# Altium PCB STB_DUTcarrier.PcbDoc
Units mm, origin at the board's own origin, x right, y up, seen from the top; angles counter-clockwise.
Board outline 154 x 150 mm, 2 copper layers (Top Layer, Bottom Layer), stack 0.781 mm thick; 9 components, 12 nets, 177 pads, 161 vias.
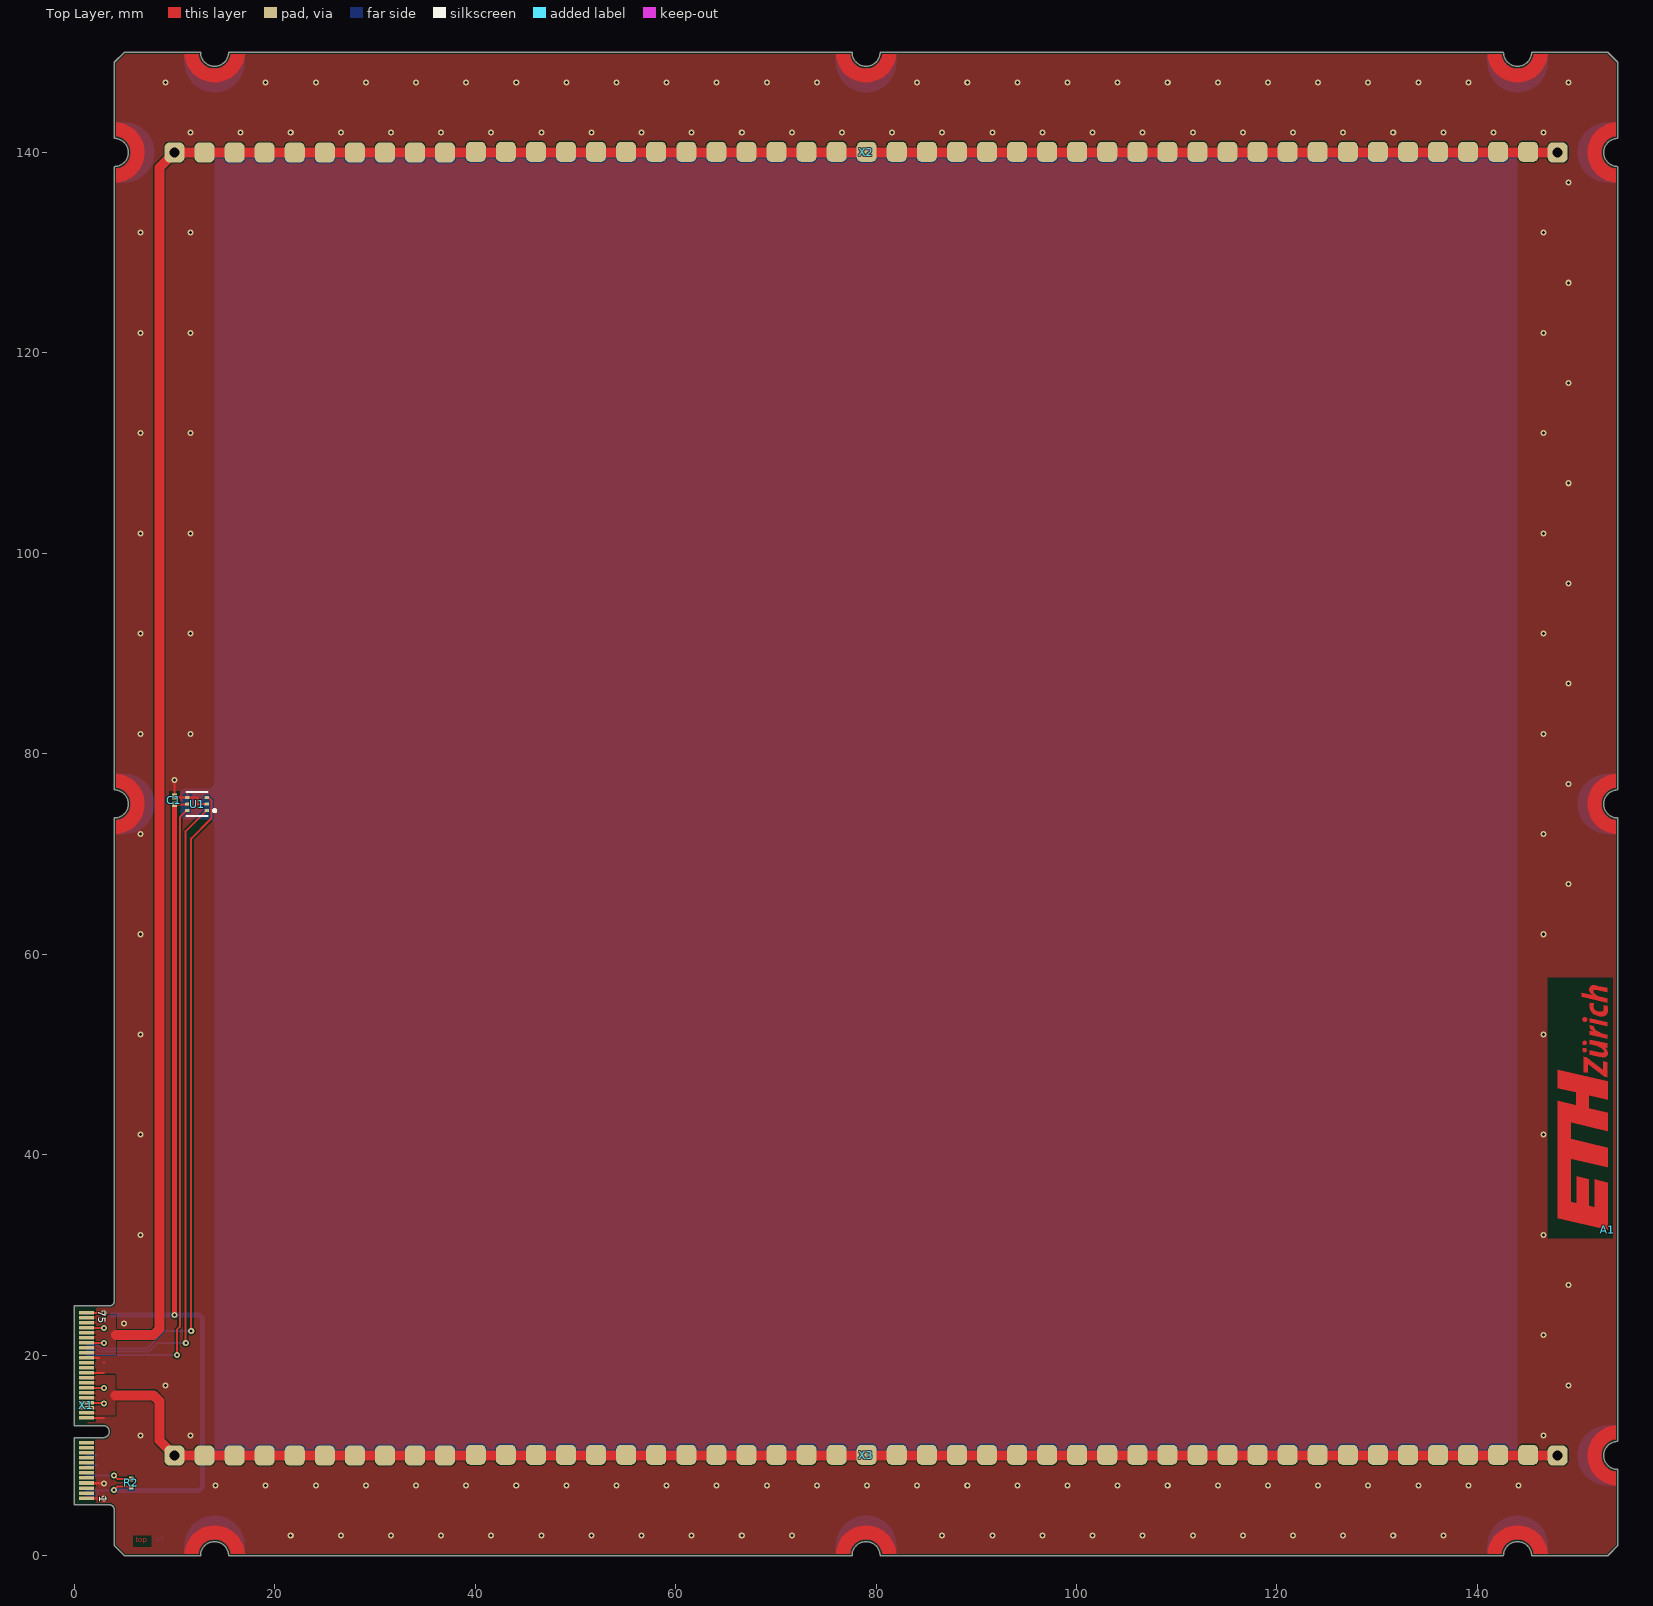
[diagram p0: Top Layer view]
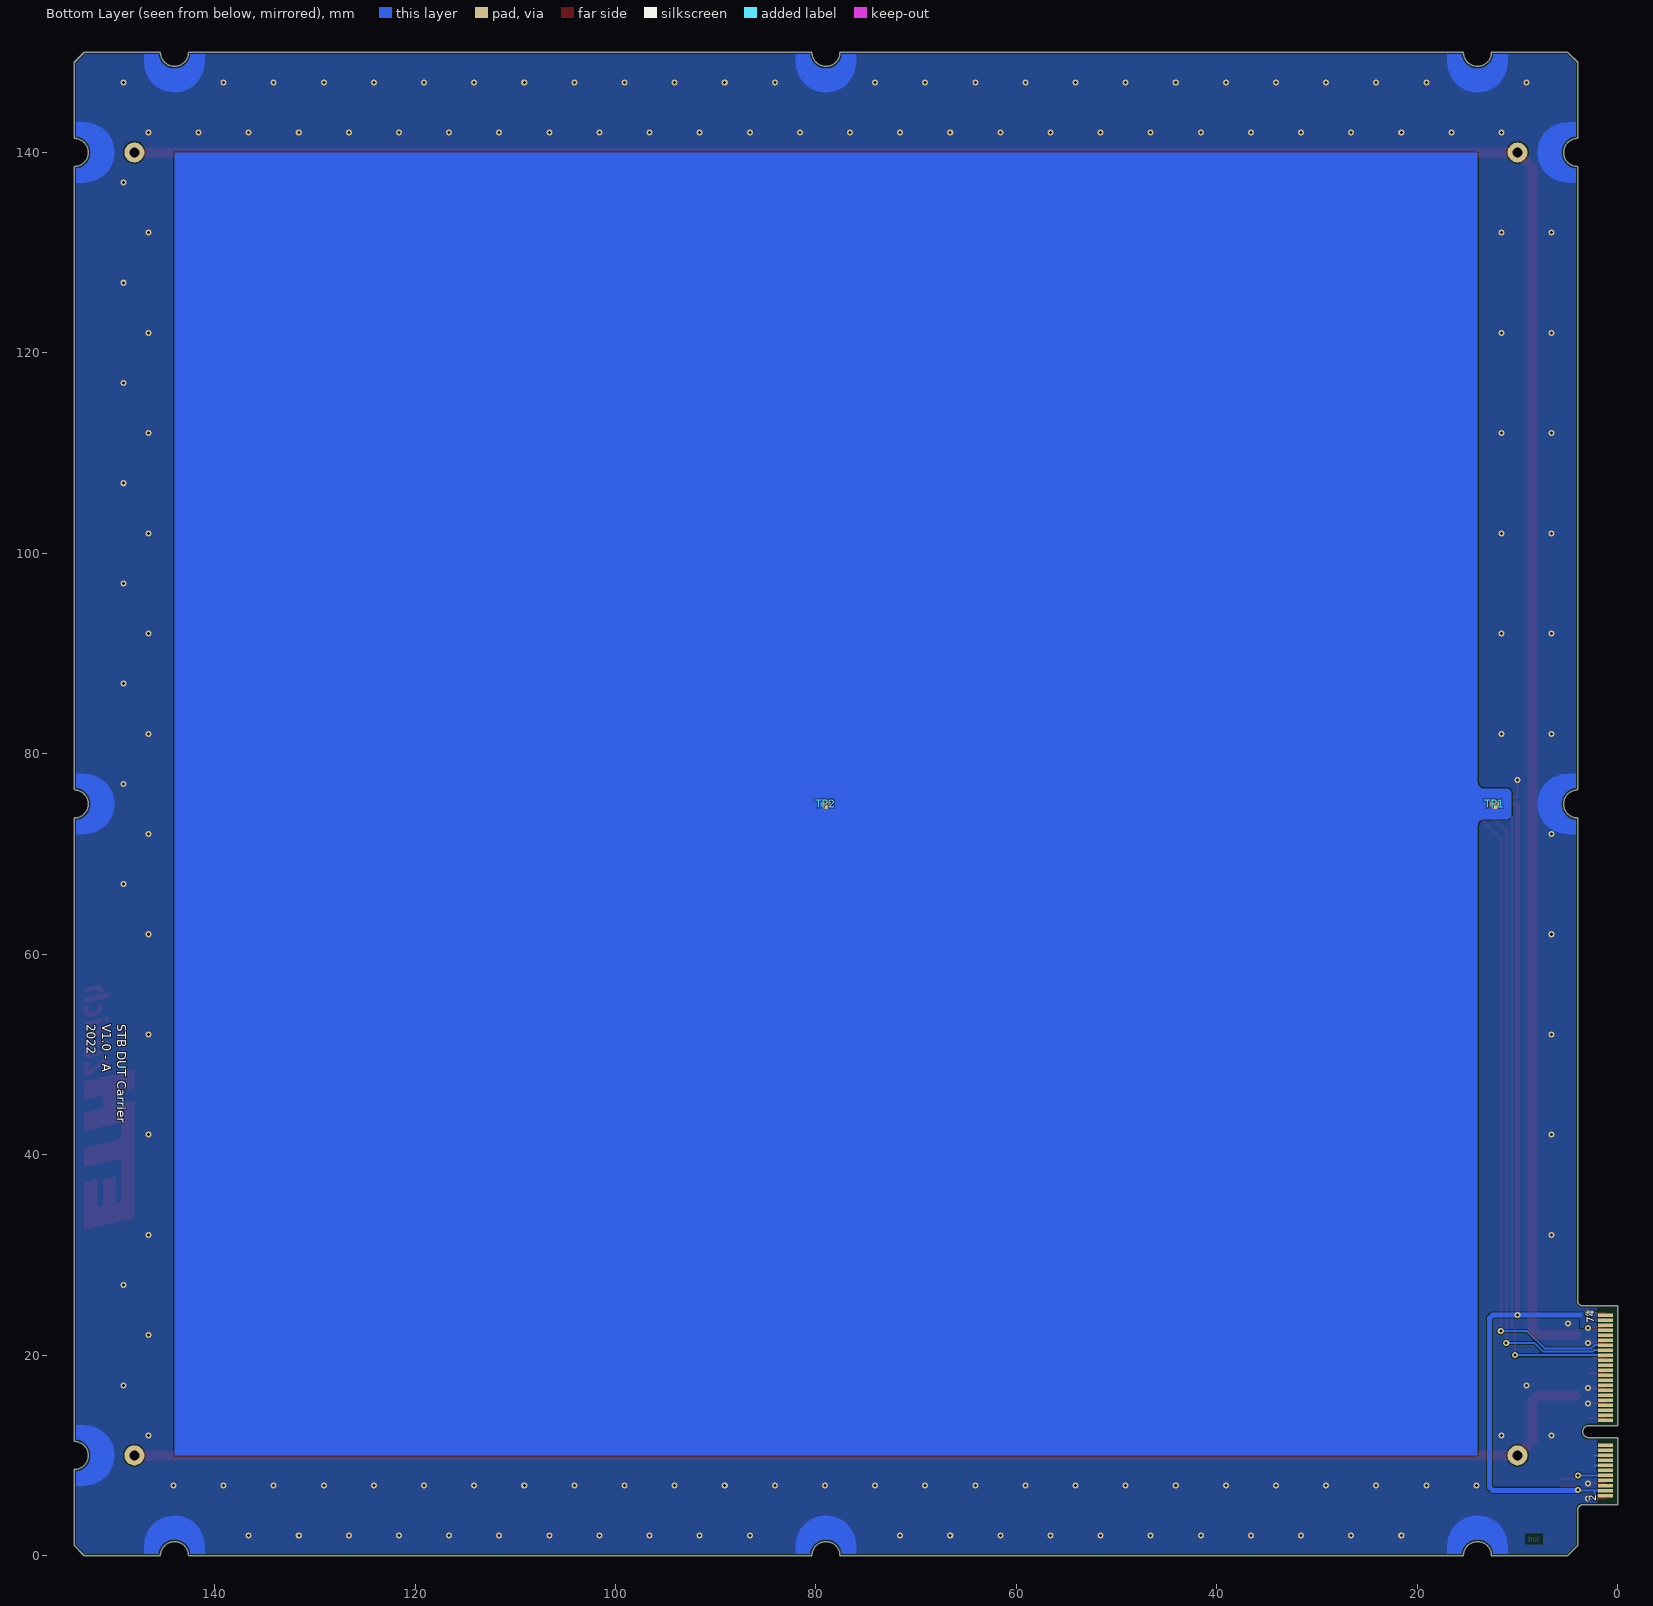
[diagram p1: Bottom Layer view, seen from below]

## Layer stack, top to bottom
Top Solder: solder mask 0.01, SM-001, Dk 4
Top Layer: signal copper 0.035
Dielectric 1: core 0.7112, Core-039, Dk 4.8
Bottom Layer: signal copper 0.035
Bottom Solder: solder mask 0.01, SM-001, Dk 4

## Board outline
0,5.075 3.5,5.075 cw(c3.5,4.575) 4,4.575 4,1 5,0 12.6,0 cw(c14,0) 14,1.4 cw(c14,0) 15.4,0 77.6,0 cw(c79,0) 79,1.4 cw(c79,0) 80.4,0 142.6,0 cw(c144,0) 144,1.4 cw(c144,0) 145.4,0 153,0 154,1 154,8.6 cw(c154,10) 152.6,10 cw(c154,10) 154,11.4 154,73.6 cw(c154,75) 152.6,75 cw(c154,75) 154,76.4 154,138.6 cw(c154,140) 152.6,140 cw(c154,140) 154,141.4 154,149 153,150 147,150 145.4,150 cw(c144,150) 144,148.6 cw(c144,150) 142.6,150 80.4,150 cw(c79,150) 79,148.6 cw(c79,150) 77.6,150 76,150 17,150 15.4,150 cw(c14,150) 14,148.6 cw(c14,150) 12.6,150 5,150 4,149 4,143 4,141.4 cw(c4,140) 5.4,140 cw(c4,140) 4,138.6 4,76.4 cw(c4,75) 5.4,75 cw(c4,75) 4,73.6 4,72 4,25.425 cw(c3.5,25.425) 3.5,24.925 0,24.925 0,12.975 2.9,12.975 cw(c2.9,12.375) 3.5,12.375 cw(c2.9,12.375) 2.9,11.775 0,11.775

## Design rules (kind name [scope] priority, off if disabled: settings)
BoardOutlineClearance [All] p1: gap=0.21 ignorepadtopadclearanceinfootprint=FALSE
Clearance [All] p1: gap=0.125 ignorepadtopadclearanceinfootprint=FALSE
PlaneConnect [All] p1: pad.planeconnectstyle=Relief pad.reliefexpansion=0.508 pad.reliefentries=4 pad.reliefconductorwidth=0.254 pad.reliefairgap=0.254 via.planeconnectstyle=Direct via.reliefexpansion=0.508 via.reliefentries=4 via.reliefconductorwidth=0.254 via.reliefairgap=0.254
PolygonConnect [All] p1: thpad.connectstyle=Relief thpad.reliefconductorwidth=0.254 thpad.reliefentries=4 thpad.polygonreliefangle="90 Angle" thpad.airgapwidth=0.254 smdpad.connectstyle=Relief smdpad.reliefconductorwidth=0.254 smdpad.reliefentries=4 smdpad.polygonreliefangle="90 Angle" smdpad.airgapwidth=0.254 via.connectstyle=Direct via.reliefconductorwidth=0.254 via.reliefentries=4 via.polygonreliefangle="90 Angle" via.airgapwidth=0.254
RoutingVias [All] p1: holewidth=0.3 width=0.604 viastyle="Through Hole" minholewidth=0.3 minwidth=0.604 maxholewidth=3 maxwidth=6
SolderMaskExpansion [All] p1: expansion=0.102 istentingtop=FALSE
Width [All] p1: maxlimit=4 minlimit=0.125 preferedwidth=0.2
29 further rules are at their usual default settings.

## Components (designator, comment, footprint, x,y, rotation, side; value= is the part's Value field where it differs from the comment)
A1 "Logo ETH Zurich" eth-zurich_5mm 153,32.5 r90 top
C1 "100nF" CAPC1050X55X23LL05T13 9.998,75.349 r270 top
R2 "100k" RESC1005X40X25LL05T10 5.7,7.25 r270 top value="100 kOhm"
TP1 "testPoint_1mm" TP-SM-C-100 12.264,75 r180 bottom
TP2 "testPoint_1mm" TP-SM-C-100 79,75 r90 bottom
U1 "TMP116NAIDRVR" FP-DRV0006B-MFG 12.264,74.978 r180 top
X1 "CONN PWR CARD EDGE PCB SLOT MALE" CON-67_0.5MM_PCB_SLOT 1.2,15 r270 top
X2 "CellConnector" cellConnector 79,140 r180 top
X3 "CellConnector" cellConnector 79,10 r180 top

## Footprints (in the part's own frame and the unit in brackets; to place one, negate y for a bottom-side part, rotate by r counter-clockwise, add the part's x,y. Pads: shape width x height; smd on the part's side, far side on the other; paste and mask are expansions set on the pad)
CAPC1050X55X23LL05T13 [mm] "Chip Capacitor, 2-Leads, Body 1.05x0.55mm, IPC High Density"
  rect 0.56x0.52 smd: 1(-0.39,0) 2(0.39,0)
  body extent -0.53,-0.28 0.53,0.28, height 0.55
cellConnector [mm] "dumm for cell ceonnection"
  rrect50% 2x2 smd paste-100: 1(-69,0) 1(-66.065,-0.063) 1(-63.065,-0.063) 1(-60.065,-0.063) 1(-57.065,-0.063) 1(-54.065,-0.063) 1(-51.065,-0.063) 1(-48.065,-0.063) 1(-45.065,-0.063) 1(-42.065,-0.063) 1(-39.065,-0.063) 1(-36.065,-0.063) 1(-33.065,-0.063) 1(-30.065,-0.063) 1(-27.065,-0.063) 1(-24.065,-0.063) 1(-21.065,-0.063) 1(-18.065,-0.063) 1(-15.065,-0.063) 1(-12.065,-0.063) 1(-9.065,-0.063) 1(-6.065,-0.063) 1(-3.065,-0.063) 1(-0.065,-0.063) 1(2.935,-0.063) 1(5.935,-0.063) 1(8.935,-0.063) 1(11.935,-0.063) 1(14.935,-0.063) 1(17.935,-0.063) 1(20.935,-0.063) 1(23.935,-0.063) 1(26.935,-0.063) 1(29.935,-0.063) 1(32.935,-0.063) 1(35.935,-0.063) 1(38.935,-0.063) 1(42,0) 1(45,0) 1(48,0) 1(51,0) 1(54,0) 1(57,0) 1(60,0) 1(63,0) 1(66,0) 1(69,0)
  Top Layer lines w1: 69,0 66,0 63,0 60,0 57,0 54,0 51,0 48,0 45,0 42,0 38.935,0 35.935,0 32.935,0 29.935,0 26.935,0 23.935,0 20.935,0 17.935,0 14.935,0 11.935,0 8.935,0 5.935,0 2.935,0 -0.065,0 -3.065,0 -6.065,0 -9.065,0 -12.065,0 -15.065,0 -18.065,0 -21.065,0 -24.065,0 -27.065,0 -30.065,0 -33.065,0 -36.065,0 -39.065,0 -42.065,0 -45.065,0 -48.065,0 -51.065,0 -54.065,0 -57.065,0 -60.065,0 -63.065,0 -66.065,0 -69,0
CON-67_0.5MM_PCB_SLOT [mm] "Connector 67, 0.5mm pitch - No BOM"
  rect 0.35x1.5 smd: 1(9.25,0) 3(8.75,0) 5(8.25,0) 7(7.75,0) 9(7.25,0) 11(6.75,0) 13(6.25,0) 15(5.75,0) 17(5.25,0) 19(4.75,0) 21(4.25,0) 23(3.75,0) 33(1.25,0) 35(0.75,0) 37(0.25,0) 39(-0.25,0) 41(-0.75,0) 43(-1.25,0) 45(-1.75,0) 47(-2.25,0) 49(-2.75,0) 51(-3.25,0) 53(-3.75,0) 55(-4.25,0) 57(-4.75,0) 59(-5.25,0) 61(-5.75,0) 63(-6.25,0) 65(-6.75,0) 67(-7.25,0) 69(-7.75,0) 71(-8.25,0) 73(-8.75,0) 75(-9.25,0)
  rect 0.35x1.5 smd far side: 2(9,0) 4(8.5,0) 6(8,0) 8(7.5,0) 10(7,0) 12(6.5,0) 14(6,0) 16(5.5,0) 18(5,0) 20(4.5,0) 22(4,0) 32(1.5,0) 34(1,0) 36(0.5,0) 38(0,0) 40(-0.5,0) 42(-1,0) 44(-1.5,0) 46(-2,0) 48(-2.5,0) 50(-3,0) 52(-3.5,0) 54(-4,0) 56(-4.5,0) 58(-5,0) 60(-5.5,0) 62(-6,0) 64(-6.5,0) 66(-7,0) 68(-7.5,0) 70(-8,0) 72(-8.5,0) 74(-9,0)
eth-zurich_5mm [mm] "Logo ETH Zurich"
  Top Layer circle w0.45: c17.94,2.315 r0.001
  Top Layer circle w0.45: c18.655,2.315 r0.001
  Top Layer circle w0.5: c20.997,2.288 r0.001
  Top Layer region: 19.763,1.3 19.763,1.3 19.87,1.785 19.46,1.785 19.072,0.04 19.483,0.04 19.545,0.323 19.64,0.63 19.75,0.9 19.84,1.07 19.965,1.235 20.05,1.32 20.12,1.37 20.19,1.4 20.24,1.4 20.308,1.382 20.4,1.8 20.34,1.81 20.28,1.81 20.22,1.8 20.13,1.76 20.07,1.72 19.99,1.65 19.92,1.58 19.84,1.46
  Top Layer region: 17.265,2.4 17.265,2.4 15.753,2.4 15.66,1.985 16.575,1.985 15.288,0.308 15.23,0.04 16.74,0.04 16.833,0.455 15.915,0.455 17.207,2.14
  Top Layer region: 18.61,0.04 18.61,0.04 18.998,1.785 18.535,1.785 18.385,1.102 18.3,0.9 18.2,0.72 18.1,0.56 18,0.455 17.92,0.4 17.84,0.36 17.78,0.36 17.72,0.38 17.68,0.42 17.67,0.48 17.67,0.56 17.68,0.63 17.938,1.785 17.492,1.785 17.3,0.9 17.227,0.57 17.22,0.42 17.24,0.28 17.28,0.16 17.36,0.08 17.46,0.02 17.54,0 17.7,0 17.86,0.04 18,0.12 18.105,0.225 18.22,0.36 18.15,0.04
  Top Layer region: 14.825,0 14.825,0 16,5 14.155,5 13.712,3.117 12.432,3.117 12.872,5 1.175,5 0,0 1.953,0 4.73,0 5.035,1.3 2.26,1.3 2.402,1.91 5.058,1.91 5.34,3.11 2.682,3.11 2.822,3.7 7.123,3.7 6.25,0 8.205,0 9.075,3.7 10.723,3.7 9.855,0 11.7,0 12.15,1.917 13.43,1.917 12.98,0
  Top Layer region: 22.69,1.753 22.69,1.753 22.6,1.785 22.5,1.8 22.34,1.8 22.16,1.785 21.97,1.74 21.81,1.66 21.68,1.56 21.6,1.48 21.52,1.38 21.45,1.26 21.4,1.14 21.35,1 21.32,0.87 21.3,0.74 21.3,0.57 21.32,0.42 21.35,0.32 21.4,0.22 21.46,0.14 21.54,0.08 21.63,0.04 21.72,0.02 21.92,0 22.02,0 22.2,0.02 22.313,0.048 22.36,0.06 22.403,0.453 22.31,0.42 22.18,0.39 22.08,0.38 22.01,0.38 21.93,0.4 21.86,0.44 21.82,0.48 21.79,0.54 21.77,0.61 21.76,0.68 21.76,0.77 21.78,0.9 21.82,1.03 21.87,1.14 21.93,1.23 22.02,1.34 22.1,1.39 22.18,1.42 22.26,1.43 22.38,1.43 22.49,1.42 22.54,1.41 22.61,1.39
  Top Layer region: 23.53,1.6 23.53,1.6 23.415,1.465 23.667,2.602 23.257,2.602 22.69,0.04 23.1,0.04 23.25,0.723 23.335,0.925 23.435,1.105 23.535,1.265 23.635,1.37 23.715,1.425 23.795,1.465 23.855,1.465 23.915,1.445 23.955,1.405 23.965,1.345 23.965,1.265 23.955,1.195 23.697,0.04 24.142,0.04 24.335,0.925 24.408,1.255 24.415,1.405 24.395,1.545 24.355,1.665 24.275,1.745 24.175,1.805 24.095,1.825 23.935,1.825 23.775,1.785 23.635,1.705
  Top Layer region: 20.73,0.04 20.73,0.04 21.117,1.785 20.707,1.785 20.32,0.04
FP-DRV0006B-MFG [mm]
  rrect33% 0.45x0.3 smd paste+0 mask+0: 1(-0.975,0.65) 2(-0.975,0) 3(-0.975,-0.65) 4(0.975,-0.65) 5(0.975,0) 6(0.975,0.65)
  silkscreen extent -1.88,-1.22 1.05,1.2, body extent -1.3,-1.15 1.3,1.15, height 0.25
RESC1005X40X25LL05T10 [mm] "Chip Resistor, 2-Leads, Body 1.00x0.50mm, IPC High Density"
  rect 0.5x0.45 smd: 1(-0.375,0) 2(0.375,0)
  body extent -0.53,-0.27 0.53,0.28, height 0.4
TP-SM-C-100 [mm] "Test Point, Surface Mounting, Circular, Pad Diameter 1mm"
  round 1 smd paste-1: 1(0,0)

## Part data
A1: library part CMP-00038-1
C1: library part CMP-2000-05439-1, "Chip Capacitor, 100 nF, +/- 10%, 16 V, -55 to 125 degC, 0402 (1005 Metric), RoHS, Tape and Reel", Capacitor Type=Ceramic, Case Size/Dimension=0402, Dielectric=X7R, Manufacturer="Samsung Electro-Mechanics", Manufacturer Part Number=CL05B104KO5NNNC, Max Operating Temperature=125°C, Min Operating Temperature=-55°C, Negative Tolerance=10%, Package Shape=Rectangular, Package Style=SMTMeter, Rated DC Voltage (URdc)=16V, Supplier Part Number 1=1276-1001-6-ND, Tolerance (%)=±10%, Category="Ceramic Capacitors", ComponentLink1Description=https://datasheet.ciiva.com:443/pdfs/VipMasterIC/IC/SEMS/SEMS-S-A0008384515/SEMS-S-A0008872921-1.pdf?src-supplier=IHS+Markit, ComponentLink1URL=https://datasheet.ciiva.com:443/pdfs/VipMasterIC/IC/SEMS/SEMS-S-A0008384515/SEMS-S-A0008872921-1.pdf?src-supplier=IHS+Markit, ComponentLink2Description=https://datasheet.ciiva.com/26920/getdatasheetpartid-359683-26920169.pdf?src-supplier=Verical, ComponentLink2URL=https://datasheet.ciiva.com/26920/getdatasheetpartid-359683-26920169.pdf?src-supplier=Verical, ComponentLink3Description=https://datasheet.ciiva.com/29198/458718-da-01-en-vs-kondensator-0402-29198423.pdf?src-supplier=Conrad, ComponentLink3URL=https://datasheet.ciiva.com/29198/458718-da-01-en-vs-kondensator-0402-29198423.pdf?src-supplier=Conrad, ComponentLink4Description=https://datasheet.ciiva.com/26309/mlcc-catalogdownload2013-eng-26309003.pdf?src-supplier=Distrelec, ComponentLink4URL=https://datasheet.ciiva.com/26309/mlcc-catalogdownload2013-eng-26309003.pdf?src-supplier=Distrelec, ComponentLink5Description=https://datasheet.ciiva.com/16208/cl05b104kq5nnnc-16208343.pdf?src-supplier=Future+Electronics, ComponentLink5URL=https://datasheet.ciiva.com/16208/cl05b104kq5nnnc-16208343.pdf?src-supplier=Future+Electronics, Datasheet URL=https://datasheet.ciiva.com/29198/458718-da-01-en-vs-kondensator-0402-29198423.pdf, Datasheet Version=Nov-10, Dielectric Material=Ceramic, Height=0.55mm, JESD-609 Code=e3, Length=1mm, Manufacturer URL=http://www.samsungsem.com/global/index.jsp, Mount="Surface Mount", Multilayer=Yes, Number of Pins=2, Packaging="Tape and Reel", Positive Tolerance=10%, Pricing 1="1=0.10000, 10=0.02400, 50=0.01300, 100=0.01050, 500=0.00752, 1000=0.00592, 2500=0.00538, 5000=0.00495 (USD)", Rated Voltage=16V, REACH SVHC=Yes, RoHS=Yes, RoHS Compliant=Yes, Size Code=0402, Stock 1=24854634, Supplier 1=Digi-Key, Temperature Characteristics Code=X7R, Terminal Finish=Nickel, Termination=Wraparound, Width=0.5mm
R2: library part CMP-2002-07343-1, Manufacturer="Yageo / Phycomp", Manufacturer Part Number=RC0402FR-07100KL, Max Operating Temperature=155°C, Min Operating Temperature=-55°C, Package Height=0.35mm, Package Length=1mm, Package Shape=Rectangular, Package Style=SMTMeter, Package Width=0.5mm, Rated Power Dissipation (P)=62.5mW, Rated Temperature=70°C, Resistor Type="FIXED RESISTOR", Supplier Part Number 1=311-100KLRDKR-ND, Temperature Coefficient=100ppm/°C, Tolerance=1%, Working Voltage=50V, Additional Feature="LASER TRIMMABLE", Category="Chip SMD Resistors", ComponentLink1Description=https://datasheet.ciiva.com:443/pdfs/VipMasterIC/IC/YAGO/YAGO-S-A0008145938/YAGO-S-A0008145938-1.pdf?src-supplier=IHS+Markit, ComponentLink1URL=https://datasheet.ciiva.com:443/pdfs/VipMasterIC/IC/YAGO/YAGO-S-A0008145938/YAGO-S-A0008145938-1.pdf?src-supplier=IHS+Markit, Construction=Chip, JESD-609 Code=e3, Mount="Surface Mount", Number of Pins=2, Packaging="Tape and Reel", Part Number=RC0402FR-07100KL, Pricing 1="1=0.10000, 10=0.01500, 100=0.00600, 1000=0.00267, 2500=0.00232, 5000=0.00192 (USD)", REACH SVHC=Yes, RoHS=Yes, RoHS Compliant=Yes, Size Code=0402, Stock 1=43269933, Supplier 1=Digi-Key, Technology="METAL GLAZE/THICK FILM", Terminal Finish=Nickel, Termination=Wraparound
TP1 TP2: "testPoint 1mm"
U1: library part CMP-04948-000013-1, "SENSOR DIGITAL -55C-125C 6WSON", Ambient Temperature Range High=+150°C, Ambient Temperature Range Low=-55°C, Manufacturer="Texas Instruments", Max Operating Temperature=150°C, Max Supply Voltage=5.5V, Min Supply Voltage=1.9V, Operating Supply Current=3.5-135uA, Package=DRV0006B, Package Shape/Style=Square, Supplier Part Number 1=296-48306-6-ND, Temperature="-55°C to +125°C", Temperature Range High=+125°C, Accuracy-Max (Cel)=0.5°C, Address=0b1001000, Automotive=No, Body Breadth=2inch, Body Height=0.8mm, Body Length or Diameter=2mm, Category=IC, ComponentLink1Description=https://www.ti.com:443/lit/ds/symlink/tmp116.pdf?src-supplier=IHS+Markit, ComponentLink1URL=https://www.ti.com:443/lit/ds/symlink/tmp116.pdf?src-supplier=IHS+Markit, ComponentLink2Description=Datasheet, ComponentLink2URL=https://www.ti.com/lit/ds/symlink/tmp116.pdf, ComponentLink3Description=http://www.ti.com/lit/ds/symlink/tmp116.pdf?src-supplier=Digi-Key, ComponentLink3URL=http://www.ti.com/lit/ds/symlink/tmp116.pdf?src-supplier=Digi-Key, Device Class L1=Sensors, Device Class L2="Temperature and Humidity Sensors", Device Class L3=unset, Digikey Description="SENSOR DIGITAL -55C-125C 6WSON", Height=0.8mm, Housing Material=Plastic, Interface=I2C,SMBus, Ipc Land Pattern Name=DFN200X200X80-6, JESD-609 Code=e4, Lead Free=Yes, Manufacturer Part Number=TMP116NAIDRVR, Max Junction Temp=+150°C, Min Operating Temperature=-55°C, Mount="Surface Mount", Mouser Description="±0.2°C Accurate Digital Temperature Sensor With NV Memory 6-WSON -55 to 125", Number of Bits=16, Octopart=https://octopart.com/tmp116naidrvr-texas+instruments-82367758, Output Interface Type=2-Wire, Pricing 1="1=2.48000, 10=2.22500, 25=2.09880, 100=1.78820, 250=1.67904, 500=1.46916, 1000=1.26720 (USD)", REACH SVHC=Yes, Resolution=16bits, RoHS=TRUE, RoHS Compliant=Yes, Sensor Output=I2C,SMBus, Sensors/Transducers Type="TEMPERATURE SENSOR,SWITCH/DIGITAL OUTPUT,SERIAL", Standoff Height=0mm, Stock 1=6627, Supplier 1=Digi-Key, Temperature Range Low=-55°C, Terminal Finish=Nickel, Termination=Solder
X1: library part CMP-01224-1, "Mates with 2199119-4 - No BOM", Card Thickness=0.8mm, Card Type="Non Specified - Dual Edge", Gender=Male, Mates with=2199119-4, Number of Positions=67, Pitch=0.5mm
X2 X3: "SMD dummy for cell connection"

## Free pads (board coordinates)
  round 2 hole 1: 10(10,10) 10(10,140) 10(148,10) 10(148,140)

## Via types
v1: diameter 0.604, hole 0.3, Top Layer to Bottom Layer, tented both sides, 161 vias

## Nets (pads, with @x,y where several pads share a name; then routed paths per layer and width w, separated by ;. In a path a pad name is that pad's centre, name@x,y a point inside that pad or via, vN(x,y) a via of type N, cw(c..) or ccw(c..) an arc to the next point about the centre after c; other vN are vias at no path point)
3V3: C1.2 R2.2 U1.5 X1.2 X1.4 X1.72 X1.74 | length 93.5
  Top Layer w0.2: v1(3.95,6.55) 4.284,6.884 R2.2@5.691,6.884 ; v1@9.998,24 v1(10,24) ; C1.2 10.008,74.969 11.279,74.969 U1.5
  Top Layer w0.5: v1@9.998,24 C1.2
  Bottom Layer w0.2: X1.2 2.3,6 2.3,6.5 ; X1.4 2.3,6.5 ; v1@3.95,6.525 3.95,6.5 2.3,6.5
  Bottom Layer w0.5: 3.75,24 v1(10,24) 12.487,24 12.78,23.707 12.78,6.818 12.487,6.525 3.95,6.525 v1(3.95,6.55)
CELL_NEG: pad.10@10,140 pad.10@148,140 X1.59 X1.61 X1.65 X1.67 X1.71 X1.73 X2.1 | length 122.6
  Top Layer w1: 4.15,22.025 7.909,22.025 8.495,22.611 8.495,138.495 X2.1@10,140
CELL_POS: pad.10@10,10 pad.10@148,10 X1.35 X1.37 X1.41 X1.43 X1.47 X1.49 X3.1 | length 10.7
  Top Layer w1: 4.1,16 7.914,16 8.5,15.414 8.5,11.5 X3.1@10,10
GND: C1.1 U1.2 U1.4 X1.1 X1.7 X1.14 X1.18 X1.33 X1.39 X1.45 X1.51 X1.57 X1.63 X1.69 X1.75 | length 25.1
  Top Layer w0.2: X1.1 1.225,5.725 2.944,5.725 v1(2.969,5.7) ; X1.7 1.225,7.225 2.944,7.225 v1(2.969,7.2) ; X1.33 2.962,13.75 ; X1.39 1.242,15.208 2.926,15.208 v1(2.969,15.165) ; X1.45 v1(2.969,16.75) ; X1.51 1.225,18.225 2.944,18.225 ; X1.57 1.225,19.725 2.451,19.725 ; X1.63 1.225,21.225 2.944,21.225 v1(2.969,21.2) ; X1.69 1.225,22.725 2.944,22.725 v1(2.969,22.7) ; X1.75 1.225,24.225 2.944,24.225 v1(2.969,24.2) ; 2.926,19.25 2.969,19.25 ; v1(9.998,77.398) C1.1 10.109,75.628 U1.4 12.264,75.628 12.264,75 13.239,75 U1.2
  Bottom Layer w0.2: X1.14 1.85,9 2.3,9 ; X1.18 1.85,10 2.3,10
  other v1: 21.6,2 26.6,2 31.6,2 36.6,2 41.6,2 46.6,2 51.6,2 56.6,2 61.6,2 66.6,2 71.6,2 86.6,2 91.6,2 96.6,2 101.6,2 106.6,2 111.6,2 116.6,2 121.6,2 126.6,2 131.6,2 136.6,2 14.1,7 19.1,7 24.1,7 29.1,7 34.1,7 39.1,7 44.1,7 49.1,7 54.1,7 59.1,7 64.1,7 69.1,7 74.1,7 79.1,7 84.1,7 89.1,7 94.1,7 99.1,7 104.1,7 109.1,7 114.1,7 119.1,7 124.1,7 129.1,7 134.1,7 139.1,7 144.1,7 6.6,12 11.6,12 146.6,12 9.1,17 149.1,17 146.6,22 4.95,23.15 149.1,27 6.6,32 146.6,32 6.6,42 146.6,42 6.6,52 146.6,52 6.6,62 146.6,62 149.1,67 6.6,72 146.6,72 149.1,77 6.6,82 11.6,82 146.6,82 149.1,87 6.6,92 11.6,92 146.6,92 149.1,97 6.6,102 11.6,102 146.6,102 149.1,107 6.6,112 11.6,112 146.6,112 149.1,117 6.6,122 11.6,122 146.6,122 149.1,127 6.6,132 11.6,132 146.6,132 149.1,137 11.6,142 16.6,142 21.6,142 26.6,142 31.6,142 36.6,142 41.6,142 46.6,142 51.6,142 56.6,142 61.6,142 66.6,142 71.6,142 76.6,142 81.6,142 86.6,142 91.6,142 96.6,142 101.6,142 106.6,142 111.6,142 116.6,142 121.6,142 126.6,142 131.6,142 136.6,142 141.6,142 146.6,142 9.1,147 19.1,147 24.1,147 29.1,147 34.1,147 39.1,147 44.1,147 49.1,147 54.1,147 59.1,147 64.1,147 69.1,147 74.1,147 84.1,147 89.1,147 94.1,147 99.1,147 104.1,147 109.1,147 114.1,147 119.1,147 124.1,147 129.1,147 134.1,147 139.1,147 149.1,147
GPIO2: X1.12
HeatSpreader: TP1.1 TP2.1
I2C_SYS_SCL: U1.1 X1.60 | length 64.4
  Top Layer w0.2: v1(11.128,21.2) 11.123,21.204 11.123,72.29 13.112,74.278 13.189,74.278 U1.1
  Bottom Layer w0.2: X1.60 2.358,20.5 2.51,20.348 7.437,20.348 8.295,21.207 11.121,21.207 v1(11.128,21.2)
I2C_SYS_SDA: U1.6 X1.58 | length 63.9
  Top Layer w0.2: v1(10.242,20) 10.242,22.546 10.527,22.831 10.527,73.681 11.124,74.278 11.239,74.278 U1.6
  Bottom Layer w0.2: X1.58 v1(10.242,20)
INT_TMP: U1.3 X1.62 | length 65.7
  Top Layer w0.2: v1(11.673,22.4) 11.673,71.533 13.689,73.549 13.689,75.346 13.456,75.578 13.289,75.578 U1.3
  Bottom Layer w0.2: X1.62 2.318,21 2.645,20.673 7.302,20.673 9.029,22.4 v1(11.673,22.4)
UART_RX: X1.32
UART_TX: X1.22
V_DUT: R2.1 X1.10 | length 4.7
  Top Layer w0.2: v1(3.95,8) 4.325,7.625 R2.1
  Bottom Layer w0.2: X1.10 v1(3.95,8)
pads on no net: X1.3 X1.5 X1.6 X1.8 X1.9 X1.11 X1.13 X1.15 X1.16 X1.17 X1.19 X1.20 X1.21 X1.23 X1.34 X1.36 X1.38 X1.40 X1.42 X1.44 X1.46 X1.48 X1.50 X1.52 X1.53 X1.54 X1.55 X1.56 X1.64 X1.66 X1.68 X1.70

## Polygon pours and split planes (outlines as drawn)
GND on Top Layer "GND_L01_P007" (solid, remove dead copper, pour order 7): 2.081,153.975 159.381,153.975 159.381,-1.75 1.081,-1.75
CELL_POS on Top Layer "CELL_POS_L01_P000" (solid, pour order 0): 0.5,14 0.5,18 4.1,18 4.1,14
CELL_NEG on Top Layer "CELL_NEG_L01_P001" (solid, pour order 1): 0.55,20.05 0.55,24 4.15,24 4.15,20.05
GND on Bottom Layer "GND_L02_P006" (solid, remove dead copper, pour order 6): 2.396,152.025 155.863,152.025 155.863,-1.15 1.988,-1.15
3V3 on Bottom Layer "3V3_L02_P005" (solid, pour order 5): 1.148,24.338 1.148,24.325 3.75,24.325 3.75,22.725 1.11,22.725

## Other copper
Top Layer:
  region net GND: 4.21,142.993 cw(c4,140) 4.21,137.007 4.21,138.363 ccw(c4,140) 4.21,141.637
  region net GND: 153.79,72.007 cw(c154,75) 153.79,77.993 153.79,76.637 ccw(c154,75) 153.79,73.363
  region net GND: 153.79,137.007 cw(c154,140) 153.79,142.993 153.79,141.637 ccw(c154,140) 153.79,138.363
  region net GND: 146.993,149.79 cw(c144,150) 141.007,149.79 142.363,149.79 ccw(c144,150) 145.637,149.79
  region net GND: 81.993,149.79 cw(c79,150) 76.007,149.79 77.363,149.79 ccw(c79,150) 80.637,149.79
  region net GND: 16.993,149.79 cw(c14,150) 11.007,149.79 12.363,149.79 ccw(c14,150) 15.637,149.79
  region net GND: 4.21,77.993 cw(c4,75) 4.21,72.007 4.21,73.363 ccw(c4,75) 4.21,76.637
  region net GND: 11.007,0.21 cw(c14,0) 16.993,0.21 15.637,0.21 ccw(c14,0) 12.363,0.21
  region net GND: 76.007,0.21 cw(c79,0) 81.993,0.21 80.637,0.21 ccw(c79,0) 77.363,0.21
  region net GND: 141.007,0.21 cw(c144,0) 146.993,0.21 145.637,0.21 ccw(c144,0) 142.363,0.21
  region net GND: 153.79,7.007 cw(c154,10) 153.79,12.993 153.79,11.637 ccw(c154,10) 153.79,8.363
  pour cut-out: 147,57.65 153.5,57.65 153.5,31.65 147,31.65
  text "top" at 6.15,1.317 h0.5
Bottom Layer:
  rectangle net HeatSpreader: 13.962,73.114 14.103,76.975
  rectangle net HeatSpreader: 14,10 144,140
  region net HeatSpreader: 14,77.258 cw(c13.211,77.258) 13.769,76.7 cw(c13.307,77.162) 13.307,76.509 11.07,76.509 ccw(c11.084,76.05) 10.749,76.364 10.691,76.306 ccw(c10.966,76.089) 10.618,76.046 10.618,75 14,75
  region net GND: 5,143 cw(c5,140) 5,137 4.21,137 4.21,138.363 ccw(c4,140) 4.21,141.637 4.21,143
  region net HeatSpreader: 14,71.8 14,72.742 ccw(c13.211,72.742) 13.769,73.3 ccw(c13.307,72.838) 13.307,73.491 11.07,73.491 cw(c11.084,73.95) 10.749,73.636 10.691,73.694 cw(c10.966,73.911) 10.618,73.954 10.618,75 14,75
  region net GND: 153,7 cw(c153,10) 153,13 153.79,13 153.79,11.637 ccw(c154,10) 153.79,8.363 153.79,7
  region net GND: 141,1 cw(c144,1) 147,1 147,0.21 145.637,0.21 ccw(c144,0) 142.363,0.21 141,0.21
  region net GND: 76,1 cw(c79,1) 82,1 82,0.21 80.637,0.21 ccw(c79,0) 77.363,0.21 76,0.21
  region net GND: 11,1 cw(c14,1) 17,1 17,0.21 15.637,0.21 ccw(c14,0) 12.363,0.21 11,0.21
  region net GND: 5,78 cw(c5,75) 5,72 4.21,72 4.21,73.363 ccw(c4,75) 4.21,76.637 4.21,78
  region net GND: 17,149 cw(c14,149) 11,149 11,149.79 12.363,149.79 ccw(c14,150) 15.637,149.79 17,149.79
  region net GND: 82,149 cw(c79,149) 76,149 76,149.79 77.363,149.79 ccw(c79,150) 80.637,149.79 82,149.79
  region net GND: 147,149 cw(c144,149) 141,149 141,149.79 142.363,149.79 ccw(c144,150) 145.637,149.79 147,149.79
  region net GND: 153,137 cw(c153,140) 153,143 153.79,143 153.79,141.637 ccw(c154,140) 153.79,138.363 153.79,137
  region net GND: 153,72 cw(c153,75) 153,78 153.79,78 153.79,76.637 ccw(c154,75) 153.79,73.363 153.79,72
  text "bot" at 8.946,1.408 h0.5

## Silkscreen, mask and mechanical layers (free items; w line width, h text height)
Bottom Overlay:
  text "STB DUT Carrier / V1.0 - A / 2022" at 153.051,53.025 h1.52 r90
Top Solder:
  drawing of 253 lines, arcs and shapes, not listed
  text "-" at 149.564,141.448 h3 r90
  text "6" at 76.719,133.995 h4 r90
  text "5" at 76.696,123.99 h4 r90
  text "4" at 76.741,113.93 h4 r90
  text "3" at 76.719,103.999 h4 r90
  text "2" at 76.743,93.99 h4 r90
  text "1" at 76.743,84.289 h4 r90
  text "1" at 70.438,77.984 h4 r90
  text "1" at 90.138,77.984 h4 r90
  text "6" at 20.415,77.691 h4 r90
  text "5" at 30.391,77.686 h4 r90
  text "3" at 50.415,77.694 h4 r90
  text "2" at 60.438,77.686 h4 r90
  text "2" at 100.138,77.686 h4 r90
  text "3" at 110.115,77.694 h4 r90
  text "5" at 130.091,77.686 h4 r90
  text "6" at 140.115,77.691 h4 r90
  text "4" at 40.436,77.626 h4 r90
  text "4" at 120.136,77.626 h4 r90
  text "1" at 76.743,64.588 h4 r90
  text "2" at 76.743,54.29 h4 r90
  text "3" at 76.719,44.299 h4 r90
  text "4" at 76.741,34.23 h4 r90
  text "5" at 76.696,24.29 h4 r90
  text "6" at 76.719,14.295 h4 r90
  text "+" at 149.742,5.293 h3 r90
Bottom Solder:
  rectangle: 14,10 144,140
  region: 5,143 cw(c5,140) 5,137 4,137 4,143
  region: 153,7 cw(c153,10) 153,13 154,13 154,7
  region: 141,1 cw(c144,1) 147,1 147,0 141,0
  region: 76,1 cw(c79,1) 82,1 82,0 76,0
  region: 11,1 cw(c14,1) 17,1 17,0 11,0
  region: 5,78 cw(c5,75) 5,72 4,72 4,78
  region: 17,149 cw(c14,149) 11,149 11,150 17,150
  region: 82,149 cw(c79,149) 76,149 76,150 82,150
  region: 147,149 cw(c144,149) 141,149 141,150 147,150
  region: 153,137 cw(c153,140) 153,143 154,143 154,137
  region: 153,72 cw(c153,75) 153,78 154,78 154,72
Mechanical 4:
  the board outline again, w0
Mechanical 6:
  drawing of 157 lines, arcs and shapes, not listed

## Text inside footprints (layer, text, board x,y; h text height)
X1: Top Overlay "1" at 2.5,6 h0.75 r270; Top Overlay "75" at 2.4,24.5 h0.75 r270; Mechanical 1 "Board Edge" at -1.7,19 h0.8 r270; Mechanical 1 "Final Board Thickness: 0.8 +-0.08mm" at -4.4,24.4 h0.8 r270; Mechanical 1 "All pads hard gold finished" at 0,29.8 h0.5 r270; Mechanical 1 "20-degree chamfered border from this line" at -5.2,5 h0.5 r270; Bottom Overlay "2" at 2.15,5.45 h0.75 r270; Bottom Overlay "74" at 2.35,23.2 h0.75 r270